# Altium PCB ArduinoUnoPCB.PcbDoc
Units mil, origin at the board's own origin, x right, y up, seen from the top; angles counter-clockwise.
Board outline 2850 x 2155 mil, 2 copper layers (Top Layer, Bottom Layer); 88 components, 66 nets, 297 pads, 22 vias.
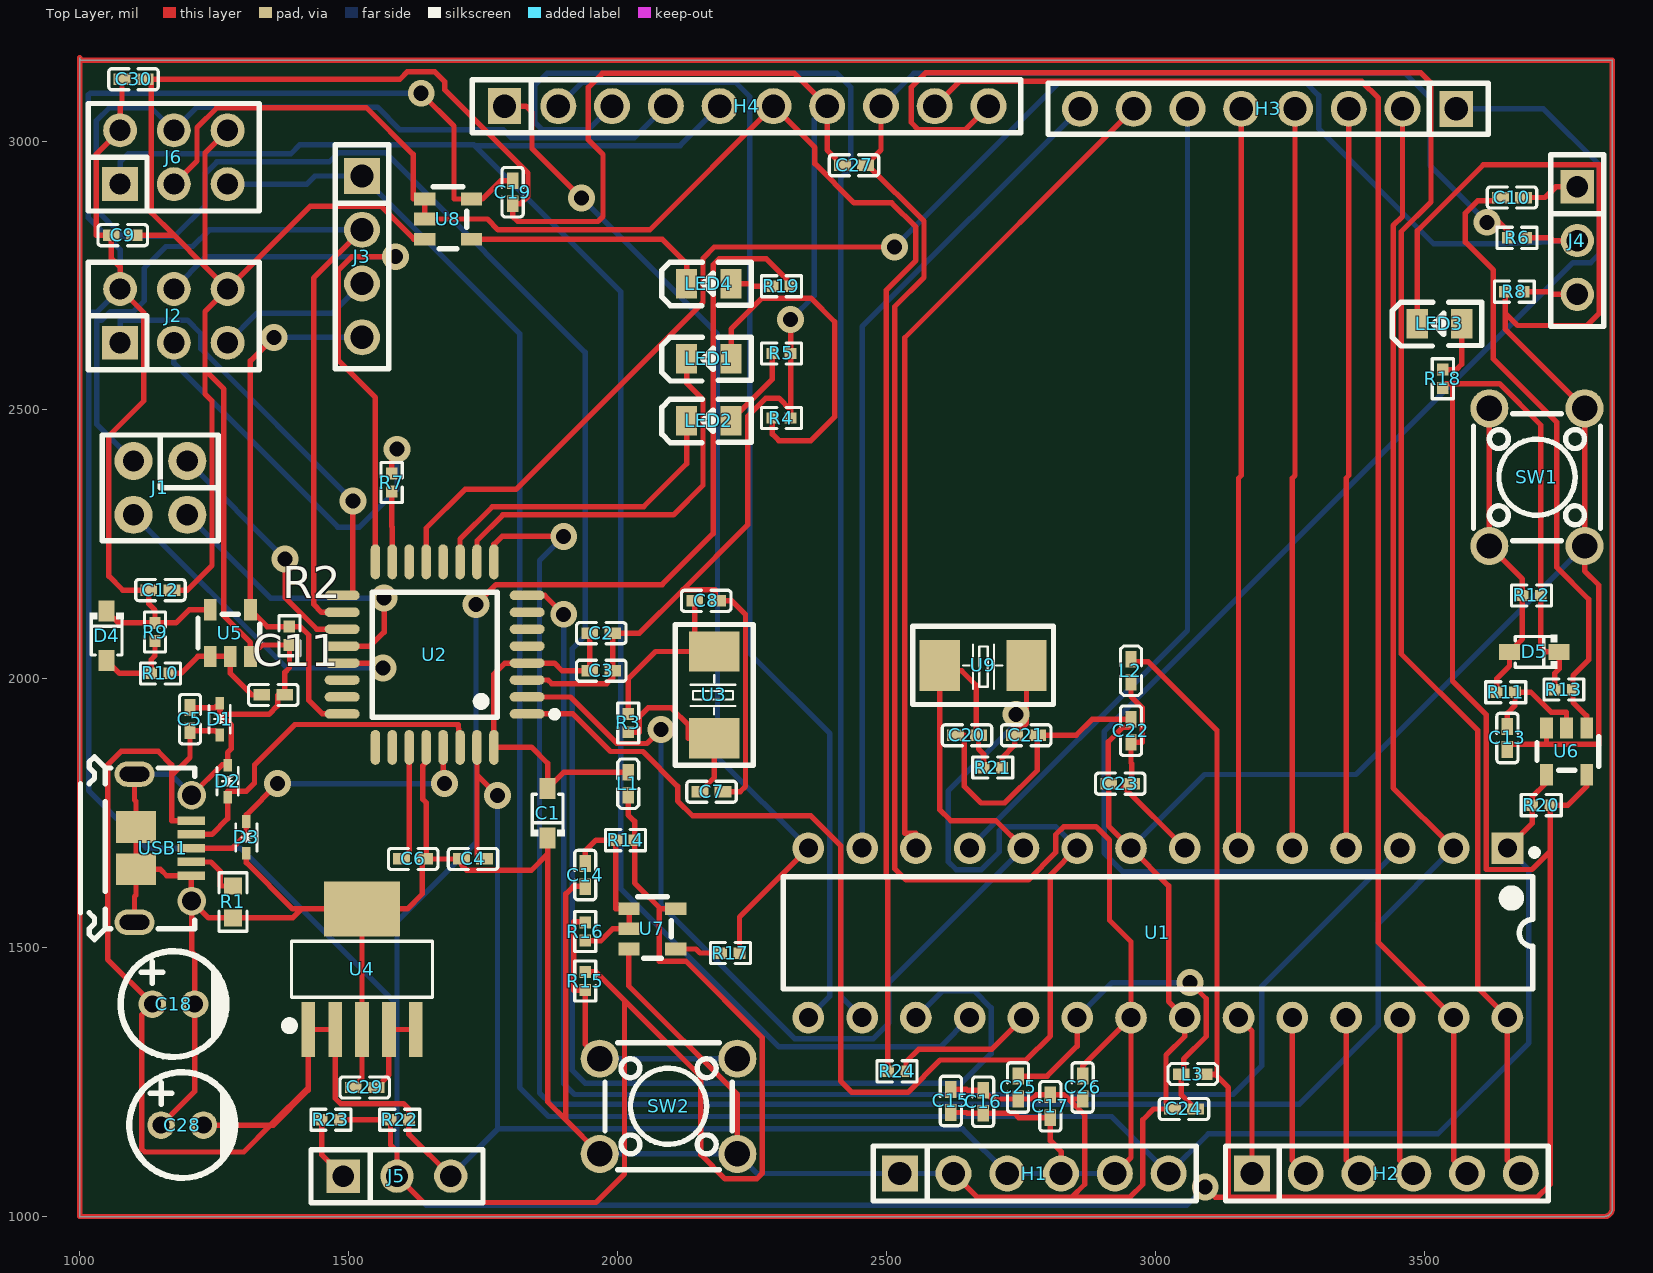
[diagram p0: Top Layer view]
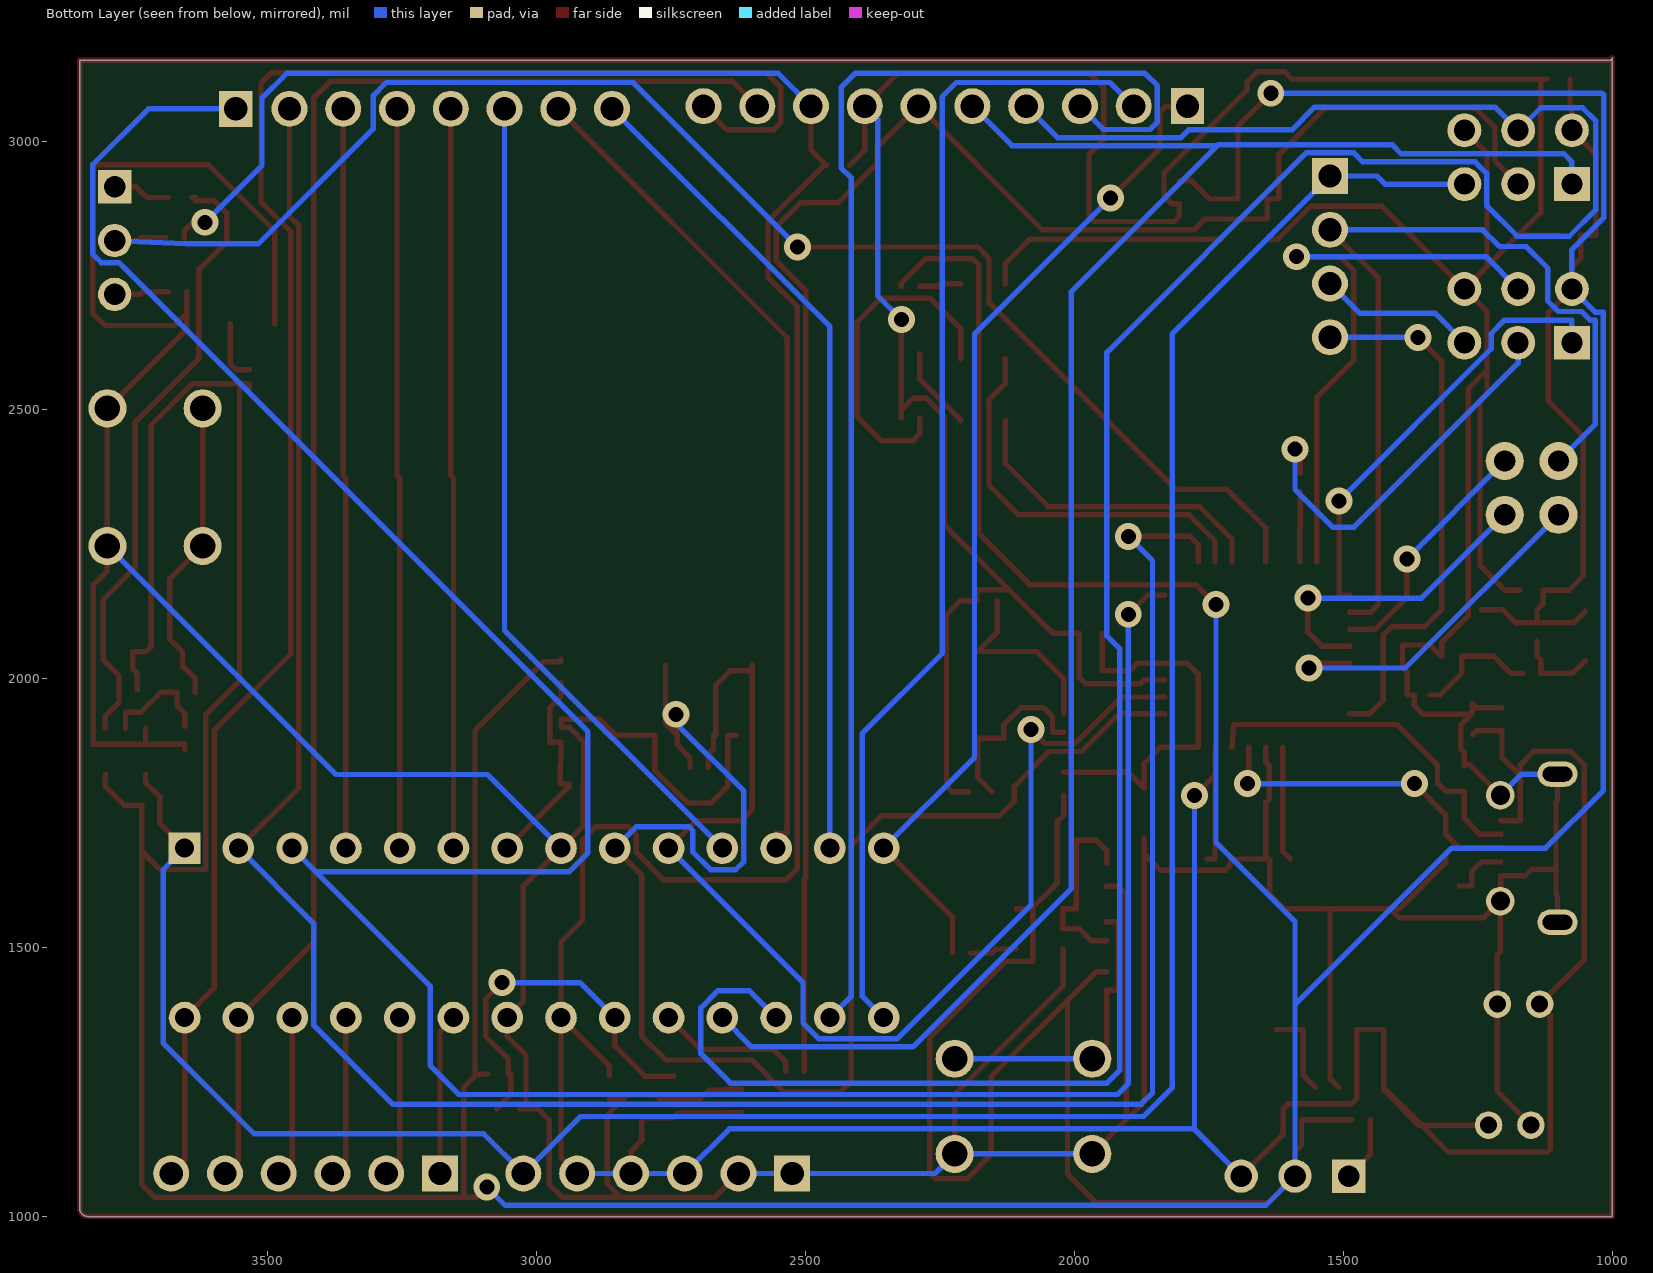
[diagram p1: Bottom Layer view, seen from below]

## Layer stack, top to bottom
Top Solder: solder mask 0.4, Solder Resist, Dk 3.5
Top Layer: signal copper 1.4
Dielectric 1: dielectric 12.6, FR-4, Dk 4.8
Bottom Layer: signal copper 1.4
Bottom Solder: solder mask 0.4, Solder Resist, Dk 3.5

## Board outline
1000,1000 1000,3155 ccw(c1005,3155) 1005,3150 3850,3150 3850,1015 cw(c3835,1015) 3835,1000

## Design rules (kind name [scope] priority, off if disabled: settings)
Clearance [All] p1: gap=10 ignorepadtopadclearanceinfootprint=FALSE except(5: Arc-Arc Arc-Track Arc-SMDPad Arc-THPad Track-Track Track-SMDPad Track-THPad SMDPad-SMDPad SMDPad-THPad THPad-THPad)
PolygonConnect [All] p1: connectstyle=Relief reliefconductorwidth=10 reliefentries=4 polygonreliefangle="90 Angle" airgapwidth=10
RoutingVias [All] p1: holewidth=28 width=50 viastyle="Through Hole" minholewidth=28 minwidth=50 maxholewidth=28 maxwidth=50
SolderMaskExpansion [All] p1: expansion=4 istentingtop=FALSE
SupplyNets "Schematic Supply Nets_4" [InNet('+5')] p1: voltage=0.000
SupplyNets "Schematic Supply Nets_3" [InNet('+5/3v3')] p2: voltage=0.000
SupplyNets "Schematic Supply Nets_2" [InNet('GND')] p3: voltage=0.000
SupplyNets "Schematic Supply Nets_1" [InNet('3V3')] p4: voltage=0.000
SupplyNets "Schematic Supply Nets" [InNet('+3V3')] p5: voltage=0.000
Width [All] p1: maxlimit=10 minlimit=10 preferedwidth=10
30 further rules are at their usual default settings.

## Components (designator, comment, footprint, x,y, rotation, side; value= is the part's Value field where it differs from the comment)
C1 "10nF" SOD-323_L1.8-W1.3-LS2.5-RD 1870,1750 r90 top value=18pF
C2 "100nF" C0402 1970,2085 r180 top value=18pF
C3 "100nF" C0402 1970,2015 r180 top value=18pF
C4 "100nF" C0402 1731.46,1665 r180 top
C5 "100nF" C0402 1205,1925 r270 top value=18pF
C6 "1uF" C0402 1620,1665 r180 top value=18pF
C7 "18pF" C0402 2175,1790 r180 top
C8 "18pF" C0402 2165,2145 r180 top
C9 "100nF" C0402 1080,2825 r0 top
C10 "100nF" C0402 3663.54,2895 r180 top value=18pF
C11 "100nF" C0402 1360,1970 r180 top value=18pF
C12 "100nF" C0402 1150,2165 r180 top value=18pF
C13 "100nF" C0402 3655,1890 r90 top value=18pF
C14 "100nF" C0402 1940,1635 r90 top value=18pF
C15 "100nF" C0402 2620,1215 r90 top
C16 "100nF" C0402 2680,1213.54 r90 top
C17 "100nF" C0402 2805,1205 r90 top
C18 "10uF" CAP-TH_BD5.0-P2.00-D0.8-FD 1174.37,1395 r0 top value=100nF
C19 "100nF" C0402 1805,2905 r270 top
C20 "18pF" C0402 2650,1895 r0 top
C21 "18pF" C0402 2760,1895 r180 top
C22 "10nF" C0402 2955,1903.54 r90 top value=100nF
C23 "100nF" C0402 2935,1805 r180 top
C24 "10nF" C0402 3053.54,1200 r180 top value=100nF
C25 "100nF" C0402 2745,1240 r270 top
C26 "100nF" C0402 2865,1240 r270 top
C27 "100nF" C0402 2440,2955 r180 top
C28 "10uF" CAP-TH_BD5.0-P2.00-D0.8-FD 1190.63,1170 r0 top value=18pF
C29 "10uF" C0402 1530,1240 r0 top value=18pF
C30 "100nF" C0402 1100,3115 r180 top value=18pF
D1 "LESD5D5.0CT1G" SOD-523_L1.2-W0.8-LS1.6-BI 1260,1925 r270 top
D2 "LESD5D5.0CT1G" SOD-523_L1.2-W0.8-LS1.6-BI 1275,1809.53 r270 top
D3 "LESD5D5.0CT1G" SOD-523_L1.2-W0.8-LS1.6-BI 1310,1705 r90 top
D4 "BAT54HT1G" SOD-323_L1.8-W1.3-LS2.5-RD 1050,2080 r270 top
D5 "BAT54HT1G" SOD-323_L1.8-W1.3-LS2.5-RD 3705,2050 r180 top
H1 "HDR-F-2.54_1X6" HDR-TH_6P-P2.54-V-M 2775,1080 r0 top
H2 "HDR-F-2.54-1*6" HDR-TH_6P-P2.54-V-M 3430,1080 r0 top
H3 "HDR-F-2.54-1*8" HDR-TH_8P-P2.54-V-F 3210,3060 r180 top
H4 "HDR-F-2.54_1X10" HDR-TH_10P-P2.54-V-F 2240,3065 r0 top
J1 "2.54-2*2" HDR-TH_4P-P2.54-V-F-R2-C2-S2.54 1150,2355 r180 top
J2 "HDR-M-2.54_2X3" HDR-TH_6P-P2.54-V-F-R2-C3-S2.54 1175,2675 r0 top
J3 "HDR-M-2.54-1*4" HDR-TH_4P-P2.54-V-F 1525,2785 r270 top
J4 "HDR-M-2.54_1X3" HDR-TH_3P-P2.54-V-F 3785,2815 r270 top
J5 "HDR-M2.54-1*3" HDR-TH_3P-P2.54-V-F 1590,1075 r0 top
J6 "HDR-M-2.54_2X3" HDR-TH_6P-P2.54-V-F-R2-C3-S2.54 1175,2970 r0 top
L1 "600H" L0402 2020,1805 r90 top value=9.1nH
L2 "600H" L0402 2955,2015 r270 top value=9.1nH
L3 "600H" L0402 3070,1265 r180 top value=9.1nH
LED1 "0805G (Green)" LED0805-R-RD 2170,2595 r0 top
LED2 "0805G (Green)" LED0805-R-RD 2170,2480 r0 top
LED3 "0805G (Green)" LED0805-R-RD 3528.65,2660 r0 top
LED4 "0805G (Green)" LED0805-R-RD 2170,2735 r0 top
R1 "0Ω" R0603 1285,1585 r270 top
R2 "10KΩ" R0402 1390,2080 r90 top value=1mΩ
R3 "1MΩ" R0402 2020,1917.96 r270 top value=1mΩ
R4 "1K" R0402 2305,2485 r0 top value=1mΩ
R5 "1K" R0402 2305,2605 r0 top value=1mΩ
R6 "100KΩ" R0402 3672.96,2820 r0 top value=1mΩ
R7 "22Ω" R0402 1580,2365 r90 top value=1mΩ
R8 "1K" R0402 3667.96,2720 r180 top value=1mΩ
R9 "10KΩ" R0402 1140,2087.04 r90 top value=1mΩ
R10 "22Ω" R0402 1150,2010 r180 top value=1mΩ
R11 "22" R0402 3652.04,1975 r180 top value=1mΩ
R12 "10KΩ" R0402 3700,2155 r0 top value=1mΩ
R13 "10KΩ" R0402 3760,1980 r180 top value=1mΩ
R14 "10KΩ" R0402 2015,1700 r0 top value=1mΩ
R15 "10KΩ" R0402 1940,1437.96 r90 top value=1mΩ
R16 "22" R0402 1940,1530 r90 top value=1mΩ
R17 "560" R0402 2210,1490 r180 top value=1mΩ
R18 "1KΩ" R0402 3535,2557.96 r270 top value=1mΩ
R19 "560" R0402 2305,2730 r0 top value=1mΩ
R20 "10KΩ" R0402 3717.96,1765 r0 top value=1mΩ
R21 "1MΩ" R0402 2697.96,1835 r0 top value=1mΩ
R22 "0" R0402 1595,1180 r0 top value=1mΩ
R23 "0" R0402 1467.04,1180 r0 top value=1mΩ
R24 "10KΩ" R0402 2520,1270 r0 top value=1mΩ
SW1 "PTS645SH50MTR92LFS" SW-TH_4P-L6.0-W6.0-P4.50-LS6.5 3710,2375 r270 top
SW2 "PTS645SH50MTR92LFS" SW-TH_4P-L6.0-W6.0-P4.50-LS6.5 2095,1205 r180 top
U1 "ATMEGA328P-PU" DIP-28_L34.6-W7.3-P2.54-LS10.2-BL 3005,1527.48 r180 top
U2 "ATMEGA16U2-AU" TQFP-32_L7.0-W7.0-P0.80-LS9.0-TL 1660,2045 r180 top
U3 "ABM7-16MHz-D2Y-T" OSC-SMD_L5.0-W3.2 2180,1970 r270 top value=16MHz
U4 "TL1963A-33DCQR" SOT-223-6_L6.5-W3.5-P1.27-LS7.0-BR 1525,1460 r270 top
U5 "SN74AHC1G09DBVR" SOT-23-5_L2.9-W1.6-P0.95-LS2.8-BL 1280,2085 r0 top
U6 "SN74AHC1G09DBVR" SOT-23-5_L2.9-W1.6-P0.95-LS2.8-BL 3765,1865 r180 top
U7 "SN74AHC1G09DBVR" SOT-23-5_L2.9-W1.6-P0.95-LS2.8-BL 2065,1535 r270 top
U8 "SN74AHC1G09DBVR" SOT-23-5_L2.9-W1.6-P0.95-LS2.8-BL 1685,2855 r270 top
U9 "ABM7-16MHz-D2Y-T" OSC-SMD_L5.0-W3.2 2680,2025 r0 top value=16MHz
USB1 "1050170001" MICRO-USB-SMD_105017-0001 1155,1685 r270 top

## Footprints (in the part's own frame and the unit in brackets; to place one, negate y for a bottom-side part, rotate by r counter-clockwise, add the part's x,y. Pads: shape width x height; smd on the part's side, far side on the other; paste and mask are expansions set on the pad)
C0402 [mm]
  rect 0.79x0.54 smd paste-100 mask+0.051: 1(-0.545,0) 2(0.545,0)
  silkscreen extent -1.17,-0.5 1.17,0.5
CAP-TH_BD5.0-P2.00-D0.8-FD [mm]
  round 1.3 hole 0.8: 1(-1,0) 2(1,0)
  silkscreen extent -2.5,-2.5 2.5,2.5
DIP-28_L34.6-W7.3-P2.54-LS10.2-BL [mm]
  rect 1.5x1.5 hole 0.9: 1(-16.51,-4)
  round 1.5 hole 0.9: 2(-13.97,-4) 3(-11.43,-4) 4(-8.89,-4) 5(-6.35,-4) 6(-3.81,-4) 7(-1.27,-4) 8(1.27,-4) 9(3.81,-4) 10(6.35,-4) 11(8.89,-4) 12(11.43,-4) 13(13.97,-4) 14(16.51,-4) 15(16.51,4) 16(13.97,4) 17(11.43,4) 18(8.89,4) 19(6.35,4) 20(3.81,4) 21(1.27,4) 22(-1.27,4) 23(-3.81,4) 24(-6.35,4) 25(-8.89,4) 26(-11.43,4) 27(-13.97,4) 28(-16.51,4)
  silkscreen extent -17.94,-3.95 17.7,2.65
HDR-TH_3P-P2.54-V-F [mil]
  rect 62x62 hole 40.16: 1(-100,0)
  round 62 hole 40.16: 2(0,0) 3(100,0)
  silkscreen extent -160,-49 160,49
HDR-TH_4P-P2.54-V-F [mm]
  rect 1.7x1.7 hole 1.1: 1(-3.81,0)
  round 1.7 hole 1.1: 2(-1.27,0) 3(1.27,0) 4(3.81,0)
  silkscreen extent -5.29,-1.27 5.29,1.27
HDR-TH_4P-P2.54-V-F-R2-C2-S2.54 [mm]
  round 1.8 hole 1: 1(-1.27,-1.27) 2(-1.27,1.27) 3(1.27,-1.27) 4(1.27,1.27)
  silkscreen extent -2.74,-2.5 2.74,2.5
HDR-TH_6P-P2.54-V-F-R2-C3-S2.54 [mm]
  rect 1.7x1.6 hole 1: 1(-2.54,-1.27)
  round 1.6 hole 1: 2(-2.54,1.27) 3(0,-1.27) 4(0,1.27) 5(2.54,-1.27) 6(2.54,1.27)
  silkscreen extent -4.04,-2.54 4.04,2.54
HDR-TH_6P-P2.54-V-M [mm]
  rect 1.7x1.7 hole 1.1: 1(-6.35,0)
  round 1.7 hole 1.1: 2(-3.81,0) 3(-1.27,0) 4(1.27,0) 5(3.81,0) 6(6.35,0)
  silkscreen extent -7.6,-1.3 7.65,1.3
HDR-TH_8P-P2.54-V-F [mm]
  rect 1.575x1.7 hole 1.1: 1(-8.89,0)
  round 1.7 hole 1.1: 2(-6.35,0) 3(-3.81,0) 4(-1.27,0) 5(1.27,0) 6(3.81,0) 7(6.35,0) 8(8.89,0)
  silkscreen extent -10.4,-1.2 10.4,1.2
HDR-TH_10P-P2.54-V-F [mm]
  rect 1.575x1.7 hole 1.1: 1(-11.43,0)
  round 1.7 hole 1.1: 2(-8.89,0) 3(-6.35,0) 4(-3.81,0) 5(-1.27,0) 6(1.27,0) 7(3.81,0) 8(6.35,0) 9(8.89,0) 10(11.43,0)
  silkscreen extent -12.95,-1.25 12.95,1.25
L0402 [mm]
  rect 0.79x0.54 smd paste-100 mask+0.051: 1(-0.545,0) 2(0.545,0)
  silkscreen extent -1.17,-0.5 1.17,0.5
LED0805-R-RD [mm]
  rect 1x1.4 smd: 1(1.05,0) 2(-1.05,0)
  silkscreen extent -2.22,-1.04 1.99,1.01
MICRO-USB-SMD_105017-0001 [mm]
  rect 0.4x1.3 smd paste-100 mask+0.051: 1(-1.3,1.33) 2(-0.65,1.33) 3(0,1.33) 4(0.65,1.33) 5(1.3,1.33)
  round 1.35 hole 0.9: 6(-2.5,1.35) 7(2.5,1.35)
  oval 1.2x1.9 hole 0.7 slot 1.4 at 90 deg: 8(3.5,-1.35) 9(-3.5,-1.35)
  rect 1.5x1.9 smd paste-100 mask+0.051: 10(-1,-1.28) 10(1,-1.28)
  silkscreen extent -4.32,-3.9 4.32,1.5
OSC-SMD_L5.0-W3.2 [mm]
  rect 1.9x2.4 smd: 1(-2.05,0) 2(2.05,0)
  silkscreen extent -3.33,-1.85 3.33,1.85
R0402 [mm]
  rect 0.566x0.54 smd paste-100 mask+0.051: 1(-0.433,0) 2(0.433,0)
  silkscreen extent -0.94,-0.5 0.94,0.5
R0603 [mil]
  rect 31.75x34.02 smd paste-3937.01 mask+2: 1(-29.66,0) 2(29.65,0)
  silkscreen extent -55,-26 55,26
SOD-323_L1.8-W1.3-LS2.5-RD [mm]
  rect 1x0.75 smd: 1(-1.173,0) 2(1.173,0)
  silkscreen extent -1.08,-0.8 0.9,0.8
SOD-523_L1.2-W0.8-LS1.6-BI [mm]
  rect 0.6x0.4 smd: 1(-0.75,0) 2(0.75,0)
  silkscreen extent -0.65,-0.5 0.65,0.5
SOT-23-5_L2.9-W1.6-P0.95-LS2.8-BL [mm]
  rect 0.6x1 smd paste+0 mask+0.05: 1(-0.95,-1.1) 2(0,-1.1) 3(0.95,-1.1) 4(0.95,1.1) 5(-0.95,1.1)
  silkscreen extent -1.52,-0.7 1.4,0.89
SOT-223-6_L6.5-W3.5-P1.27-LS7.0-BR [mm]
  rect 2.595x0.644 smd: 1(2.848,-2.54) 2(2.848,-1.27) 3(2.848,0) 4(2.848,1.27) 5(2.848,2.54)
  rect 2.595x3.6 smd: 6(-2.848,0)
  silkscreen extent -1.32,-3.63 2.87,3.33
SW-TH_4P-L6.0-W6.0-P4.50-LS6.5 [mm]
  round 1.8 hole 1.2: 1(-3.25,2.25) 2(3.25,2.25) 3(-3.25,-2.25) 4(3.25,-2.25)
  silkscreen extent -3,-3 3,3
TQFP-32_L7.0-W7.0-P0.80-LS9.0-TL [mm]
  oval 1.65x0.45 smd: 1(-4.369,2.8) 2(-4.369,2) 3(-4.369,1.2) 4(-4.369,0.4) 5(-4.369,-0.4) 6(-4.369,-1.2) 7(-4.369,-2) 8(-4.369,-2.8) 17(4.369,-2.8) 18(4.369,-2) 19(4.369,-1.2) 20(4.369,-0.4) 21(4.369,0.4) 22(4.369,1.2) 23(4.369,2) 24(4.369,2.8)
  oval 0.45x1.65 smd: 9(-2.8,-4.381) 10(-2,-4.381) 11(-1.2,-4.381) 12(-0.4,-4.381) 13(0.4,-4.381) 14(1.2,-4.381) 15(2,-4.381) 16(2.8,-4.381) 25(2.8,4.381) 26(2,4.381) 27(1.2,4.381) 28(0.4,4.381) 29(-0.4,4.381) 30(-1.2,4.381) 31(-2,4.381) 32(-2.8,4.381)
  silkscreen extent -5.81,-2.94 2.95,2.97

## Part data
C1 C2 C3 C5 C6 C7 C8 C10 C11 C12 C13 C14 C20 C21 C28 C29 C30: library part GRM1555C1H180JA01D, JLCPCB Part Class="Extended Part", LCSC Part Name="18pF ±5% 50V", Manufacturer=muRata(村田), Tolerance=±5%, Add into BOM=yes, Convert to PCB=yes, Datasheet=https://atta.szlcsc.com/upload/public/pdf/source/20161108/1478586362936.pdf, Device=GRM1555C1H180JA01D, Manufacturer Part=GRM1555C1H180JA01D, Supplier=LCSC, Supplier Footprint=0402, Supplier Part=C33149, Symbol=GRM1555C1H180JA01D
C4 C9 C15 C16 C17 C18 C19 C22 C23 C24 C25 C26 C27: library part KM104M050D11RR0VH2FP0, JLCPCB Part Class="Extended Part", LCSC Part Name="100nF ±20% 50V", Lifetime @ Temp=1000hrs@105℃, Manufacturer=CX(承兴), Tolerance=±20%, Add into BOM=yes, Convert to PCB=yes, Datasheet=https://atta.szlcsc.com/upload/public/pdf/source/20211027/06D6BA3719C264B639DC286D935D03EA.pdf, Device=KM104M050D11RR0VH2FP0, Manufacturer Part=KM104M050D11RR0VH2FP0, Supplier=LCSC, Supplier Footprint=插件,D5xL11mm, Supplier Part=C28061, Symbol="0.1UF 50V"
D1 D2 D3: Breakdown Voltage=5.6V, JLCPCB Part Class="Extended Part", LCSC Part Name=双向ESD, Manufacturer=LRC(乐山无线电), Maximum Clamping Voltage=18.6V, Peak Pulse Current (Ipp)=9.4A, Reverse Stand-Off Voltage (Vrwm)=5V, Add into BOM=yes, Convert to PCB=yes, Datasheet=https://atta.szlcsc.com/upload/public/pdf/source/20190807/C383211_633DF4B4E2C161403226E5235FE33A1C.pdf, Device=LESD5D5.0CT1G, Manufacturer Part=LESD5D5.0CT1G, polarity=Bidirectional, Supplier=LCSC, Supplier Footprint=SOD-523, Supplier Part=C383211, Symbol=LESD5D5.0CT1G, Type=ESD
D4 D5: Forward Voltage (Vf@If)=800mV@100mA, JLCPCB Part Class="Extended Part", LCSC Part Name="电压:30V 电流:200mA", Manufacturer=onsemi(安森美), Rectified Current=200mA, Reverse Leakage Current (Ir)=2uA@25V, Reverse Voltage (Vr)=30V, Add into BOM=yes, Convert to PCB=yes, Datasheet=https://atta.szlcsc.com/upload/public/pdf/source/20131023/1457706657764.pdf, Device=BAT54HT1G, Manufacturer Part=BAT54HT1G, Supplier=LCSC, Supplier Footprint=SOD-323, Supplier Part=C21107, Symbol=BAT54HT1G
H1: library part HB-PH3-25416PB2GOP, Color=Black, Current Rating=3A, JLCPCB Part Class="Extended Part", LCSC Part Name="1x6P 间距:2.54mm 方针 直插", Manufacturer=HANBO(汉博), Operating Temperature=-40℃~+105℃, Voltage Rating (Max)=250V, Add into BOM=yes, Circluar Pins/Square Pins=Policy, Contact Material=Brass, Contact Plating=Gold, Convert to PCB=yes, Datasheet=https://atta.szlcsc.com/upload/public/pdf/source/20230803/F72D259687963761DF1B552F3BB84A31.pdf, Device=HB-PH3-25416PB2GOP, Insulation Height=2.54mm, Length of End Connection Pin=3mm, Length of Mating Pin=6mm, Manufacturer Part=HB-PH3-25416PB2GOP, Mounting Type=Straight, Number of Pins=6P, Number of Rows="Single Row", Pin Structure=1x6P, Pitch=2.54mm, Row Spacing=2.54mm, Supplier=LCSC, Supplier Footprint=插件,P=2.54mm, Supplier Part=C6332199, Symbol=HB-PH3-25416PB2GOP
H2: library part 2.54-1*6, JLCPCB Part Class="Extended Part", Manufacturer=ZHOURI(洲日), Add into BOM=yes, Convert to PCB=yes, Datasheet=https://atta.szlcsc.com/upload/public/pdf/source/20250227/F941FC765EF241ABFB2D5D72948A31A5.pdf, Device=2.54-1*6, LCSC Part Name=2.54-1*6, Manufacturer Part=2.54-1*6, Number of Pins=6P, Number of Rows="Single Row", Pin Structure=1x6P, Pitch=2.54mm, Supplier=LCSC, Supplier Footprint=插件,P=2.54mm, Supplier Part=C5156615, Symbol=2.54-1*6
H3: library part PM2.54-1*8, Current Rating (Max)=2.5A, JLCPCB Part Class="Extended Part", LCSC Part Name="间距:2.54mm 1x8P 直插", Manufacturer=ZHOURI(洲日), Operating Temperature Range=-40℃~+105℃, Add into BOM=yes, Circular Hole / Square Hole=方孔, Convert to PCB=yes, Datasheet=https://atta.szlcsc.com/upload/public/pdf/source/20221031/E5BAE727A502DC7C69CE947E807E2296.pdf, Device=PM2.54-1*8, Holes Direction=Top, Holes Structure=1x8P, Insulation Height=8.5mm, Manufacturer Part=PM2.54-1*8, Mounting Type=Straight, Number of Holes=8P, Number of Rows=Plugin, Pitch=2.54mm, Row Spacing=2.54mm, Supplier=LCSC, Supplier Footprint=插件,P=2.54mm, Supplier Part=C5224027, Symbol=PM2.54-1*8
H4: library part BX-PM2.54-1-10PY, Current Rating (Max)=-, JLCPCB Part Class="Extended Part", LCSC Part Name="1x10P 间距:2.54mm 直插", Manufacturer=Bossie(博锡), Operating Temperature Range=-40℃~+105℃, Soldering Temperature(Max)=260℃@5S, Voltage Rating (Max)=1kV, Add into BOM=yes, Circular Hole / Square Hole="Square Hole", Contact Material=-, Contact Plating=Gold, Convert to PCB=yes, Datasheet=https://atta.szlcsc.com/upload/public/pdf/source/20231017/732584F7F0B2D917FE86A7328410C345.pdf, Device=BX-PM2.54-1-10PY, Holes Direction=Top, Holes Structure=1x10P, Insulation Height=8.5mm, Manufacturer Part=BX-PM2.54-1-10PY, Mounting Type="Direct Insert", Number of Holes=10P, Number of Rows="Single Row", Pitch=2.54mm, Row Spacing=-, Supplier=LCSC, Supplier Footprint=插件,P=2.54mm, Supplier Part=C18078132, Symbol=BX-PM2.54-1-10PY
J1: Current Rating (Max)=2.5A, JLCPCB Part Class="Extended Part", LCSC Part Name="间距:2.54mm 2x2P 直插", Manufacturer=ZHOURI(洲日), Operating Temperature Range=-40℃~+105℃, Voltage Rating (Max)=-, Add into BOM=yes, Circular Hole / Square Hole="Square Holes", Convert to PCB=yes, Datasheet=https://atta.szlcsc.com/upload/public/pdf/source/20220328/0DEB63D734370D90CA736158671615A0.pdf, Device=2.54-2*2, Holes Direction=Top, Holes Structure=2x2P, Insulation Height=8.5mm, Manufacturer Part=2.54-2*2, Mounting Type=Straight, Number of Holes=4P, Number of Rows=双排, Pitch=2.54mm, Row Spacing=2.54mm, Supplier=LCSC, Supplier Footprint=插件,P=2.54mm, Supplier Part=C2977590, Symbol=2.54-2*2
J2 J6: library part PM254-2-03-Z-8.5, Current Rating (Max)=3A, JLCPCB Part Class="Extended Part", LCSC Part Name="2x3P 间距:2.54mm 直插", Manufacturer=HCTL(华灿天禄), Operating Temperature Range=-40℃~+105℃, Soldering Temperature(Max)=260℃@5S, Voltage Rating (Max)=-, Add into BOM=yes, Circular Hole / Square Hole="Square Holes", Contact Material="Copper Alloy", Convert to PCB=yes, Datasheet=https://atta.szlcsc.com/upload/public/pdf/source/20230609/3D36CA2C1BFC9FD1C3F709AD9DFEB9C2.pdf, Device=PM254-2-03-Z-8.5, Holes Direction=Top, Holes Structure=2x3P, Insulation Height=8.5mm, Manufacturer Part=PM254-2-03-Z-8.5, Mounting Type=Straight, Number of Holes=6P, Number of Rows=双排, Pitch=2.54mm, Row Spacing=2.54mm, Supplier=LCSC, Supplier Footprint=插件,P=2.54mm, Supplier Part=C2897404, Symbol=PM254-2-03-Z-8.5
J3: library part PM2.54-1*4, Current Rating (Max)=2.5A, JLCPCB Part Class="Extended Part", LCSC Part Name="间距:2.54mm 1x4P 直插", Manufacturer=ZHOURI(洲日), Operating Temperature Range=-40℃~+105℃, Add into BOM=yes, Circular Hole / Square Hole=方孔, Convert to PCB=yes, Datasheet=https://atta.szlcsc.com/upload/public/pdf/source/20220729/3385E3C3A9122AF204A83235A2975C64.pdf, Device=PM2.54-1*4, Holes Direction=Top, Holes Structure=1x4P, Insulation Height=8.5mm, Manufacturer Part=PM2.54-1*4, Mounting Type=Straight, Number of Holes=4P, Number of Rows=Plugin, Pitch=2.54mm, Row Spacing=2.54mm, Supplier=LCSC, Supplier Footprint=插件,P=2.54mm, Supplier Part=C5116530, Symbol=PM2.54-1*4
J4: library part PM254V-11-03-H85, JLCPCB Part Class="Extended Part", LCSC Part Name="间距:2.54mm 1x3P 直插", Manufacturer=XFCN(兴飞), Add into BOM=yes, Contact Material=Brass, Contact Plating=-, Convert to PCB=yes, Datasheet=https://atta.szlcsc.com/upload/public/pdf/source/20200518/C541849_85853D71FC67C51915A806977A588FDA.pdf, Device=PM254V-11-03-H85, Holes Structure=1x3P, Insulation Height=-, Manufacturer Part=PM254V-11-03-H85, Mounting Type=Straight, Number of Holes=3P, Number of Rows=Plugin, Pitch=2.54mm, Row Spacing=-, Supplier=LCSC, Supplier Footprint=插件,P=2.54mm, Supplier Part=C541850, Symbol=PM254V-11-03-H85
J5: library part PM2.54-1*3, Current Rating (Max)=2.5A, JLCPCB Part Class="Extended Part", LCSC Part Name="间距:2.54mm 1x3P 直插", Manufacturer=ZHOURI(洲日), Operating Temperature Range=-40℃~+105℃, Add into BOM=yes, Circular Hole / Square Hole=方孔, Convert to PCB=yes, Datasheet=https://atta.szlcsc.com/upload/public/pdf/source/20220729/0B9CDCB2053AD78CED9CDFEF888323E9.pdf, Device=PM2.54-1*3, Holes Direction=Top, Holes Structure=1x3P, Insulation Height=8.5mm, Manufacturer Part=PM2.54-1*3, Mounting Type=Straight, Number of Holes=3P, Number of Rows=Plugin, Pitch=2.54mm, Row Spacing=2.54mm, Supplier=LCSC, Supplier Footprint=插件,P=2.54mm, Supplier Part=C5116529, Symbol=PM2.54-1*3
L1 L2 L3: library part LQG15HS9N1J02D, JLCPCB Part Class="Extended Part", LCSC Part Name="9.1nH ±5%", Manufacturer=muRata(村田), Q @ Freq=8@100MHz, Saturation Current (Isat)=-, Tolerance=±5%, Add into BOM=yes, Convert to PCB=yes, Datasheet=https://atta.szlcsc.com/upload/public/pdf/source/20180612/C185484_14F678484DDF036353DC67B6265A9221.pdf, Device=LQG15HS9N1J02D, Manufacturer Part=LQG15HS9N1J02D, Supplier=LCSC, Supplier Footprint=0402, Supplier Part=C162547, Symbol=LQG15HS9N1J02D, Type=叠层电感
LED1 LED2 LED3 LED4: library part KT-0805G, Color Temperature=-, Emitted Color=Emerald, JLCPCB Part Class="Basic Part", LCSC Part Name="0805 翠绿 高亮", Manufacturer=KENTO, Add into BOM=yes, Convert to PCB=yes, Datasheet=https://atta.szlcsc.com/upload/public/pdf/source/20170209/1486607340485.pdf, Device=KT-0805G, Diode Configuration=-, Dominant Wavelength=-, Forward Current=-, Forward Voltage (VF)=-, Lamp Holder Type=-, Lens Color=-, Luminous Intensity=-, Manufacturer Part=KT-0805G, Mounting Sytle=-, Operating Temperature=-, Peak Wavelength=-, Power Dissipation=-, Supplier=LCSC, Supplier Footprint=0805, Supplier Part=C2297, Symbol="0805G (Green)", Viewing Angle=-
R1: JLCPCB Part Class="Extended Part", Manufacturer=YAGEO(国巨), Manufacturer Part=RC0603FR-070RL, nameAlias=Value, spicePre=R, spiceSymbolName=RC0603FR-070RL, Supplier=LCSC, Supplier Part=C100044
R2 R3 R4 R5 R6 R7 R8 R9 R10 R11 R12 R13 R14 R15 R16 R17 R18 R19 R20 R21 R22 R23 R24: library part WSL25121L000FEA18, JLCPCB Part Class="Extended Part", LCSC Part Name="1mΩ ±1% 2W", Manufacturer=VISHAY(威世), Rated Current=-, Temperature Coefficient=±275ppm/℃, Tolerance=±1%, Add into BOM=yes, Convert to PCB=yes, Datasheet=https://atta.szlcsc.com/upload/public/pdf/source/20180730/C149567_AEEE3780A8EE98747C02CEA4CDC81D3F.pdf, Device=WSL25121L000FEA18, Manufacturer Part=WSL25121L000FEA18, Mounting Sytle="Surface Mount", Rated Output Voltage=-, Supplier=LCSC, Supplier Footprint=2512, Supplier Part=C149567, Symbol=WSL25121L000FEA18, Type="Current Sensing Resistors"
SW1 SW2: library part TC-00104FB-110E-03, Contact Current=50mA, JLCPCB Part Class="Extended Part", Manufacturer=HOOYA(皓宇电子), Voltage Rating (DC)=12V, Add into BOM=yes, Convert to PCB=yes, Datasheet=https://atta.szlcsc.com/upload/public/pdf/source/20240226/4796A29EA251D564C3D729191F5C4338.pdf, Device=TC-00104FB-110E-03, LCSC Part Name=TC-00104FB-110E-03, Manufacturer Part=TC-00104FB-110E-03, Supplier=LCSC, Supplier Footprint=DIP, Supplier Part=C7542981, Symbol=TC-00104FB-110E-03
U1: JLCPCB Part Class="Extended Part", LCSC Part Name="基于AVR增强型RISC架构的低功耗CMOS 8位微控制器 MSL=1", Low-Voltage Detect=有, Manufacturer=MICROCHIP(美国微芯), Operating Temperature Range=-40℃~+85℃, Operating Voltage Range=1.8V~5.5V, ADC (Bit)=10bit, Add into BOM=yes, CCP Capture/Compare=-, communication protocol=-, Convert to PCB=yes, CPU Core=AVR, CPU Maximum Speed=20MHz, DAC (Bit)=-, Datasheet=https://atta.szlcsc.com/upload/public/pdf/source/20150124/1457707257819.pdf, Device=ATMEGA328P-PU, Direct Memory Access=-, EEPROM=1KB, GPIO Ports Number=23, Infrared Data Association=-, Internal Comparator=-, Internal Oscillator=有, Manufacturer Part=ATMEGA328P-PU, Peripheral/Function=WDT；PWM, Program Memory Type=FLASH, Program Storage Size=32KB, PWM (Bit)=-, RAM Size=2KB, Real-Time Clock=-, Secure Digital Input and Output=-, Supplier=LCSC, Supplier Footprint=DIP-28-300mil, Supplier Part=C33901, Symbol=ATMEGA328P-PU, Universal Serial Bus=-, Watchdog=有
U2: JLCPCB Part Class="Extended Part", Low-Voltage Detect=有, Manufacturer=MICROCHIP(美国微芯), Operating Temperature Range=-40℃~+85℃, Operating Voltage Range=2.7V~5.5V, ADC (Bit)=-, Add into BOM=yes, CCP Capture/Compare=-, communication protocol=-, Convert to PCB=yes, CPU Core=AVR, CPU Maximum Speed=16MHz, DAC (Bit)=-, Datasheet=https://atta.szlcsc.com/upload/public/pdf/source/20150921/1457707392275.pdf, Device=ATMEGA16U2-AU, Direct Memory Access=-, EEPROM=512Byte, GPIO Ports Number=22, Infrared Data Association=-, Internal Comparator=-, Internal Oscillator=有, LCSC Part Name=ATMEGA16U2-AU, Manufacturer Part=ATMEGA16U2-AU, Peripheral/Function=WDT；PWM, Program Memory Type=FLASH, Program Storage Size=16KB, PWM (Bit)=-, RAM Size=512Byte, Real-Time Clock=-, Secure Digital Input and Output=-, Supplier=LCSC, Supplier Footprint=TQFP-32(7x7), Supplier Part=C59019, Symbol=ATMEGA16U2-AU, Universal Serial Bus=有, Watchdog=有
U3 U9: library part X503216MSB2GI, Frequency Stability=±20ppm, JLCPCB Part Class="Extended Part", LCSC Part Name="16MHz ±10ppm 20pF", Manufacturer=YXC(扬兴晶振), Normal temperature Frequency Tolerance=±10ppm, Operating Temperature=-40℃~+85℃, Add into BOM=yes, Convert to PCB=yes, Datasheet=https://atta.szlcsc.com/upload/public/pdf/source/20240329/44922B0AF7B60E58E9B66993B6077277.pdf, Device=X503216MSB2GI, Manufacturer Part=X503216MSB2GI, Supplier=LCSC, Supplier Footprint=SMD5032, Supplier Part=C112572, Symbol=X503216MSB2GI, Type="Surface Mount Crystal"
U4: Dropout Voltage=550mV@(1.5A), JLCPCB Part Class="Extended Part", LCSC Part Name="具有反向电流和反向电压保护功能的 1.5A、20V 超低压降稳压器", Manufacturer=TI(德州仪器), Maximum Input Voltage=20V, Operating Temperature=-40℃~+125℃, Output Current=1.5A, Output Voltage=3.3V, Power Supply Rejection Ratio (PSRR)=63dB@(120Hz), standby current=1mA, Add into BOM=yes, Convert to PCB=yes, Datasheet=https://www.ti.com/cn/lit/gpn/tl1963a, Device=TL1963A-33DCQR, Feature="防静电保护；低ESR；Thermal Protection(TSD)；Overcurrent Protection(OCP)；带使能", Manufacturer Part=TL1963A-33DCQR, Number of Outputs=1, Output Polarity="Positive electrode", Output Type=Fixed, Supplier=LCSC, Supplier Footprint=SOT-223-6, Supplier Part=C2873060, Symbol=TL1963A-33DCQR
U5 U6 U7 U8: JLCPCB Part Class="Extended Part", Manufacturer=TI(德州仪器), Operating Temperature=-55℃~+125℃, Quiescent Current (Max)=1uA, Sink Current=8mA, Source Current=-, Supply Voltage=2V~5.5V, Add into BOM=yes, Convert to PCB=yes, Datasheet=https://www.ti.com/cn/lit/gpn/sn74ahc1g09, Device=SN74AHC1G09DBVR, High Level Range (VIH)=1.5V~3.85V, LCSC Part Name=SN74AHC1G09DBVR, Logic Gate Type=与门, Low Level Range (VIL)=500mV~1.65V, Manufacturer Part=SN74AHC1G09DBVR, Number of Channels=1, Propagation Delay Time=7.5ns@5V,50pF, Series=74AHCSeries, Supplier=LCSC, Supplier Footprint=SOT-23-5, Supplier Part=C840099, Symbol=SN74AHC1G09DBVR
USB1: Current Rating - Power (Max)=-, JLCPCB Part Class="Extended Part", LCSC Part Name="Micro-B 母 卧贴", Manufacturer=MOLEX, Operating Temperature Range=-30℃~+85℃, Add into BOM=yes, Connector Type=Micro-B, Convert to PCB=yes, Datasheet=https://atta.szlcsc.com/upload/public/pdf/source/20171113/C136000_15105610884381115465.pdf, Device=1050170001, Gender=Female, Manufacturer Part=1050170001, Mounting Style=卧贴, Number of Contacts=5P, Number of Ports=1, Standard="USB 2.0", Supplier=LCSC, Supplier Footprint=SMD, Supplier Part=C136000, Symbol=105017-0001

## Via types
v1: diameter 50, hole 28, Top Layer to Bottom Layer, 22 vias

## Nets (pads, with @x,y where several pads share a name; then routed paths per layer and width w, separated by ;. In a path a pad name is that pad's centre, name@x,y a point inside that pad or via, vN(x,y) a via of type N, cw(c..) or ccw(c..) an arc to the next point about the centre after c; other vN are vias at no path point)
3V3: C29.2 U4.4 U4.5 | length 167.6
  Top Layer w10: C29.2 1575,1263.54 U4.4 U4.5
16U2_16MHZ_XTAL1: C7.2 R3.2 U3.2 | length 344.1
  Top Layer w10: R3.2 2041,1900.92 2041,1930 2057,1946 2100,1946 2131.71,1914.29 2131.71,1889.29 U3.2 2180,1816.46 C7.2
16U2_16MHZ_XTAL2: C8.2 R3.1 U3.1 | length 355.4
  Top Layer w10: R3.1 2020,2000 2070.71,2050.71 U3.1 2143.54,2087.17 C8.2
16U2_BUF_RESET: C11.2 R10.1 U5.1 U5.2 | length 232.9
  Top Layer w10: R10.1 1188,2010 1219.69,2041.69 U5.1 U5.2 1280,2010 1320,1970 C11.2
16U2_HDR_RESET: J2.5 J3.3 | length 295.6
  Bottom Layer w10: J2.5 1330,2680 1470,2680 J3.3
16U2_MISO: J2.1 U2.17 | length 826.3
  Top Layer w10: U2.17 1508,2155.24 v1(1508,2331)
  Bottom Layer w10: J2.1 1075,2667 1200,2667 1225,2642 1225,2614 v1(1508,2331)
16U2_MOSI: J2.4 U2.16 | length 1124.2
  Top Layer w10: U2.16 1549.76,2523.24 1481,2592 1481,2760 1506,2785 v1(1587,2785)
  Bottom Layer w10: J2.4 1235,2785 v1(1587,2785)
16U2_PB4: J1.3 J3.2 U2.18 | length 1681.6
  Top Layer w10: U2.18 1450,2123.74 1435,2138.74 1435,2745 J3.2
  Bottom Layer w10: J1.3 1031.53,2473.47 1031.53,2666.5 1040.5,2666.5 1057,2683 1100,2683 1120,2703 1120,2764 1160,2804 1210,2804 1241,2835 J3.2
16U2_PB5: J1.1 U2.19 | length 459.7
  Top Layer w10: v1(1382,2223) 1382,2151 1440.76,2092.24 U2.19
  Bottom Layer w10: J1.1 v1(1382,2223)
16U2_PB6: J1.2 U2.20 | length 582.2
  Top Layer w10: U2.20 1540,2060.75 1566,2086.75 v1(1566,2150)
  Bottom Layer w10: J1.2 1355,2150 v1(1566,2150)
16U2_PB7: J1.4 U2.21 | length 661.9
  Top Layer w10: U2.21 1554.75,2029.25 v1(1564,2020)
  Bottom Layer w10: J1.4 1385,2020 v1(1564,2020)
16U2_RESET: J3.4 R2.2 U2.24 U5.4 | length 1010.4
  Top Layer w10: v1(1361,2635) 1317.4,2591.4 U5.4 1348.67,2097.04 R2.2 1410,2097.04 1426,2081.04 1426,1960 1451.24,1934.76 U2.24
  Bottom Layer w10: v1(1361,2635) J3.4
16U2_RX_LED: LED1.2 U2.10 | length 749.8
  Top Layer w10: U2.10 1738.74,2256.74 1787,2305 2104,2305 2159,2360 2159,2519.65 2128.65,2550 LED1.2
16U2_SCLK: J2.3 R7.2 | length 732.4
  Top Layer w10: R7.2 1580,2417 v1(1590,2427)
  Bottom Layer w10: J2.3 1175,2587 1480,2282 1520,2282 1590,2352 v1(1590,2427)
16U2_TX_LED: LED2.2 U2.11 | length 601.9
  Top Layer w10: U2.11 1707.24,2260 1767.24,2320 2048.65,2320 2128.65,2400 LED2.2
16U2PROG_328P_RESET: J4.2 R6.2 U2.13 | length 2852.5
  Top Layer w10: U2.13 1644.25,2280 1716.5,2352.25 1811.25,2352.25 2159,2700 2159,2782 2180,2803 v1(2515,2803) ; R6.2 3735,2820 3740,2815 J4.2
  Bottom Layer w10: v1(2515,2803) 2821,3109 3280,3109 3304,3085 3304,3023 3518,2809 3651,2809 J4.2
328P_16MHZ_XTAL1: C21.2 R21.2 U1.9 U2.1 U9.2 | length 2846
  Top Layer w10: U2.1 1917.24,1934.76 1987.22,1864.78 2047.22,1864.78 2112,1800 2112,1773 2140,1745 2360,1745 2415,1690 2415,1252 2436,1231 2540,1231 2600,1291 2760,1291 2805,1336 2805,1634.96 U1.9 ; R21.2 2715,1853 2738.54,1876.54 C21.2 ; v1(2741,1934) C21.2@2741,1897.46 ; U9.2 2760.71,1917.17 C21.2@2741,1897.46 ; C21.2 C21.2@2741,1897.46 ; C21.2 2741,1895 C21.2@2741,1897.46
  Bottom Layer w10: v1(2741,1934) 2741,1917 2615,1791 2615,1660 2630,1645 2677,1645 2710,1678 2710,1718 2717,1725 2814.96,1725 U1.9
328P_16MHZ_XTAL2: C20.2 R21.1 U1.10 U2.2 U9.1 | length 2284.1
  Top Layer w10: U2.2 1912.52,1966.26 1999,1879.78 2054.78,1879.78 v1(2081,1906) ; U9.1 U9.1@2599.29,2015 ; R21.1 2680.92,1860 2671.46,1869.46 C20.2 2667,1895 2667,1988 2640,2015 U9.1@2599.29,2015 ; U1.10 2703.96,1736 2620,1736 2599.29,1756.71 U9.1@2599.29,2015
  Bottom Layer w10: v1(2081,1906) 2081,1579.47 2330,1330.47 2475.47,1330.47 2505,1360 2505,1434.96 U1.10
328P_AUTORESET: C10.2 R13.1 U6.1 | length 1155.8
  Top Layer w10: C10.2 3634,2895 3634,2889.37 3600,2889.37 3576.78,2866.15 3576.78,2812.22 3629,2760 3629,2595 3747,2477 3747,2207 3806,2148 3806,2034.96 3777.04,2006 R13.1 3777.04,1956.36 3802.4,1931 U6.1
328P_BUF_RESET: C13.2 R11.1 U6.2 | length 210.3
  Top Layer w10: C13.2 3655,1936 3669.08,1950.08 R11.1 3699,1975 3736,1938 3765,1938 U6.2
328P_RESET: H1.6 J3.1 J6.5 R20.1 U1.1 U6.4 | length 4661.8
  Top Layer w10: U1.1 3700.92,1730.88 R20.1 3700.92,1780 3727.6,1806.68 U6.4
  Bottom Layer w10: J6.5 1422.25,2920 1437.25,2935 J3.1 1818,2642 1818,1240 1872,1186 2919,1186 H1.6 3099,1154 3526,1154 3695,1323 3695,1644.96 U1.1
+3V3: J5.1 R23.1 | length 121.6
  Top Layer w10: R23.1 1450,1115 J5.1
+5: C4.1 C5.2 C15.1 C16.1 C17.1 C18.1 C26.1 C27.1 C28.2 D1.2 H1.3 H1.4 H1.5 H4.8 J5.3 R6.1 R22.2 U1.21 U2.31 U4.1 U4.2 USB1.1 | length 9169.5
  Top Layer w10: USB1.1 1171,1736.18 1171,1820 ; C28.2 1355,1170 ; D1.2 1251.94,1903.54 C5.2 1205,1854 1171,1820 ; J5.3 1612.04,1152.96 R22.2 1612.04,1200 1602.04,1210 1485,1210 1475,1220 U4.2 U4.1 1425,1240 ; U2.31 1738.74,1821.26 ; C4.1 1738.74,1665 1738.74,1821.26 ; v1(1777,1783) 1738.74,1821.26 ; H4.8 2490,2983.54 C27.1 2466,2955 2570,2851 2570,2746.47 2515.47,2691.94 2515.47,1647 2536.47,1626 2764,1626 2815,1677 2815,1710 2830,1725 2890,1725 2915,1700 2915,1551 2955,1511 U1.21 ; C15.1 2649,1193.54 2650.46,1192.08 C16.1 2738,1192.08 2746.54,1183.54 C17.1 2805,1141 2825,1121 H1.4 ; C26.1 2865,1280 U1.21 ; H1.5 2955,1110 U1.21 ; v1(3617,2849) 3640,2849 3655.92,2833.08 R6.1 ; 1171,1820 1171,1840 1146,1865 1077,1865 1052,1840 1052,1478 C18.1 1115,1375 1115,1126 1121,1120 1305,1120 1355,1170 ; 1355,1170 1360,1170 1425,1235 1425,1240 ; 1355,1170 1425,1240
  Bottom Layer w10: v1(1777,1783) 1777,1163 ; H4.8 2551,3126 3465,3126 3511,3080 3511,2955 v1(3617,2849) ; H1.5 H1.4 H1.3 2642,1163 1777,1163 ; 1777,1163 1777,1162 J5.3 1777,1163
+5/3v3: C9.1 C12.2 C19.1 C30.2 D4.1 D5.1 J2.2 J5.2 J6.2 L1.1 L2.1 L3.1 R9.2 R12.2 R13.2 R14.2 R15.2 R18.2 R19.2 R20.2 R22.1 R23.2 U5.5 U6.5 U7.5 U8.5 | length 15126.3
  Top Layer w10: D4.1 1072.09,2104.08 R9.2 ; C30.2 1078.54,3068.54 1075,3065 J6.2 1031,2976 1031,2825 C9.1 1058.54,2782.46 1075,2766 J2.2 1119,2681 1119,2517 1054,2452 1054,2191 1080,2165 C12.2 1128.54,2139.46 1140,2128 R9.2 ; U5.5 1203.23,2128.31 1179,2104.08 R9.2 ; R23.2 R22.1 1577.96,1133.04 1590,1121 J5.2 1639,1026 1960,1026 2013,1079 2013,1402 ; v1(1635,3089) 1696,3028 1696,2892.4 U8.5 1749,2892.4 1783.06,2926.46 C19.1 ; v1(1737,2138) 1774,2175 2083.03,2175 2178,2269.97 2178,2770 2189,2781 2277.04,2781 2322.04,2736 R19.2 ; R15.2 1960,1455 2013,1402 ; L1.1 2020,1747.04 2032.04,1735 R14.2 2032.04,1620.36 2080,1572.4 ; U7.5 2080,1572.4 ; L2.1 2955,2032 2987,2032 3115,1904 3115,1265 3113,1263 ; v1(3093,1055) 3112,1036 3136,1036 ; R18.2 3535,2549 3553,2549 ; R13.2 3742.96,2010 3751.17,2018.21 D5.1 3727,2050 3717.04,2059.96 R12.2 3717.04,2471.96 3640,2549 3553,2549 ; U6.5 3802.4,1800 3767.4,1765 R20.2 3735,1680 ; 2013,1402 2155,1260 2155,1115 2200,1070 2259,1070 2269,1080 2269,1333 2127,1475 2078,1475 2078,1572.4 2080,1572.4 ; 3113,1263 3136,1240 3136,1036 ; 3113,1263 3111,1265 L3.1 3113,1263 ; 3136,1036 3711,1036 3735,1060 3735,1680 ; 3553,2549 3553,1996 3615.47,1933.53 3615.47,1645.43 3700.43,1645.43 3735,1680
  Bottom Layer w10: v1(1635,3089) 1019,3089 1016,3086 1016,2857 1075,2798 J2.2 1031.53,2681.53 1016.53,2681.53 1016.53,1792.47 1124,1685 1299,1685 1590,1394 ; v1(1737,2138) 1737,1696 1590,1549 1590,1394 ; v1(3093,1055) 3059,1021 1644,1021 J5.2 1590,1394
GND: C1.1 C2.1 C3.1 C4.2 C5.1 C6.1 C7.1 C8.1 C9.2 C11.1 C12.1 C13.1 C14.1 C15.2 C16.2 C17.2 C18.2 C19.2 C20.1 C21.1 C22.2 C23.2 C24.2 C25.2 C26.2 C27.2 C28.1 C29.1 C30.1 D1.1 D2.1 D3.1 H1.1 H1.2 H4.7 J2.6 J6.6 LED3.2 R1.2 R2.1 R4.2 R5.2 R8.2 SW1.1 SW1.2 SW2.1 SW2.2 U1.8 U1.22 U2.3 U2.28 U4.3 U4.6 U5.3 U6.3 U7.3 U8.3 USB1.5 USB1.6 USB1.7 USB1.8 USB1.9 USB1.10 | length 17361.9
  Top Layer w10: C9.2 1175,2825 ; USB1.8 1101.86,1595 1104.61,1597.75 USB1.10@1104.61,1645.63 ; USB1.9 1101.86,1774.75 1104.61,1772 1104.61,1724.37 USB1.10@1104.61,1645.63 ; C30.1 C30.1@1133,3115 ; C28.1 1213.74,1232.48 C18.2 1213.74,1487 1208.15,1492.59 USB1.7 ; C12.1 1200,2165 1246,2211 1246,2517 1233,2530 1233,2574 ; C5.1 1251.93,1946.46 D1.1 ; USB1.6 1264.72,1840 D2.1@1275,1840 ; D2.1 D2.1@1275,1840 ; J6.6 1233,2978 1233,2767 ; D3.1 1310,1658 1395.89,1572.11 1412.76,1572.11 ; C29.1 1525,1256.46 U4.3 U4.6 ; U8.3 1621.4,2817.6 1560,2879 1429,2879 J2.6 ; U2.28 1644.25,1845 1638,1838.75 1638,1776.04 1644.25,1769.79 C6.1@1644.25,1665 ; U2.3 1871,1997.76 1877.76,1991 1980,1991 1991,2002 1991,2015 C3.1 C2.1 2041,2085 2121.63,2165.63 ; C1.1 1870,1674 ; C14.1 1940,1614 1918,1614 1904,1600 1904,1179.47 ; SW2.2 1904,1179.47 ; U7.3 2021,1497.6 2021,1429 2222.95,1227.05 SW2.1 ; C7.1 2228,1790 2238,1800 2238,2120 2213,2145 C8.1 2182,2145 2182,2165.63 2121.63,2165.63 ; R4.2 2322.04,2500 ; v1(2322.04,2668) R5.2 2322.04,2500 ; C27.2 2390,2983.54 H4.7 2329,3126 1972,3126 1946,3100 1946,3002 1973,2975 1973,2860 1963.43,2850.43 1814.57,2850.43 1805,2860 C19.2 1820,2883.54 1833.54,2897.08 1833.54,2940.46 1678.97,3095.03 1678.97,3110.03 1660,3129 1609.33,3129 1595.33,3115 C30.1@1133,3115 ; C15.2 2649,1236.46 2650.46,1235 C16.2 2696.46,1218.54 C25.2 2771,1218.54 2778.92,1226.46 C17.2 2831,1226.46 2838.92,1218.54 ; H1.2 2669,1036 2845,1036 ; C20.1 2645,1895 2645,1800 2676,1769 2720,1769 2781,1830 2781,1895 C21.1 2853,1895 2883,1925 C22.2 2955,1910 2940,1910 2913,1883 2913,1805 C23.2 2913.54,1726.42 U1.8 3025,1614.96 3025,1400 U1.22 3055,1335 3020,1300 3020,1212.08 C24.2 2997,1200 2977,1180 2977,1060 2953,1036 2845,1036 ; C26.2 2838.92,1218.54 ; LED3.2 3487.3,2833.06 3610.24,2956 3826,2956 3826,2680 3803,2657 3673.92,2657 3650.92,2680 ; R8.2 3650.92,2680 ; C13.1 3655,1878 3727.6,1878 ; U6.3 3727.6,1878 ; USB1.10@1104.61,1645.63 1150,1645.63 1161.83,1633.8 USB1.5 1207.36,1587.36 USB1.7 ; C30.1@1133,3115 1133,2867 1175,2825 ; 1175,2825 1233,2767 ; USB1.7 1239.38,1555.35 R1.2 1396,1555.35 1412.76,1572.11 ; 1233,2574 1233,2683 J2.6 ; 1233,2574 1268,2539 1268,2117 1317.4,2067.6 U5.3 1338.67,2062.96 R2.1 1390,2020.54 1381.46,2012 C11.1 1368,1970 1368,1950 1352,1934 1262,1934 ; 1233,2767 J2.6 ; D1.1 1262,1934 ; D1.1 1260,1936 1262,1934 ; 1262,1934 1282,1914 1282,1870 1275,1863 D2.1@1275,1840 ; 1412.76,1572.11 U4.6 ; U4.6 1609.11,1572.11 1637,1600 1637,1665 C6.1 C6.1@1644.25,1665 ; C6.1@1644.25,1665 C4.2 1710,1654 1720,1644 1840,1644 1870,1674 ; 1870,1674 1870,1213.47 1904,1179.47 ; 2121.63,2165.63 2242,2286 2242,2488 2276,2522 2300.04,2522 2322.04,2500 ; 2838.92,1218.54 2869,1188.46 2869,1060 2845,1036 ; 3650.92,2680 3650.92,2650.62 SW1.1 SW1.2 3798.58,2200.42 3825,2174 3825,1878 3727.6,1878
  Bottom Layer w10: USB1.9 1168.78,1822.8 USB1.6 ; SW2.2 SW2.1 2259.37,1080 H1.1 H1.2 ; v1(2322.04,2668) 2366,2711.96 2366,3041 H4.7 ; U1.8 3092.04,1822 3373.54,1822 SW1.2
IO8: H4.1 R17.1 U1.14 | length 1885.5
  Top Layer w10: H4.1 1830,3065 1841,3054 1841,2986 v1(1933,2894) ; R17.1 2227.04,1557 U1.14
  Bottom Layer w10: v1(1933,2894) 2186,2641 2186,1853.96 U1.14
MISO: H4.5 J6.1 U1.18 | length 3488.6
  Bottom Layer w10: J6.1 1075,2961.5 1090,2976.5 1392.5,2976.5 1409.47,2993.47 1732.57,2993.47 1734.5,2991.53 ; H4.5 2116.53,2991.53 1734.5,2991.53 ; U1.18 2600.47,1315.47 2300.47,1315.47 2006,1609.94 2006,2720.03 1734.5,2991.53
MOSI: H4.4 J6.4 U1.17 | length 4916.1
  Bottom Layer w10: H4.4 2031.53,3006.53 1802.16,3006.53 1787.7,3021 1595.33,3021 1553.33,3063 1218,3063 J6.4 1133,3062 1055,3062 1031,3038 1031,2872 1080,2823 1176.5,2823 1233.5,2880 1233.5,2940 1255,2961.5 1464.03,2961.5 1481,2978.47 1568.53,2978.47 1940,2607 1940,2080 1916,2056 1916,1272 1940,1248 2640,1248 2695,1303 2695,1388 2663,1420 2605,1420 U1.17
NetC1_2: C1.2 C2.2 C3.2 L1.2 U2.4 U2.32 | length 720.6
  Top Layer w10: U2.32 U2.32@1770.24,1873 ; C2.2 C3.2 1897.25,2015 1883,2029.25 U2.4 1790.55,2029.25 1770.24,2008.93 U2.32@1770.24,1873 ; L1.2 1900.29,1826.46 C1.2 1870,1843 1840,1873 U2.32@1770.24,1873
NetC6_2: C6.2 U2.27 | length 213.4
  Top Layer w10: C6.2 1612.76,1679.22 U2.27
NetC10_1: C10.1 J4.1 | length 108.3
  Top Layer w10: C10.1 3725,2895 3745,2915 J4.1
NetC22_1: C22.1 C23.1 L2.2 U1.7 | length 403
  Top Layer w10: L2.2 2955,1967 2976,1946 2976,1882.08 C22.1 2955,1843.46 2956.46,1842 C23.1 2940,1805 2940,1799.96 U1.7
NetC24_1: C24.1 C25.1 L3.2 U1.20 | length 703.8
  Top Layer w10: C25.1 2745,1261 2799,1261 2855,1317 U1.20 ; v1(3065,1435) 3095,1405 3095,1335 3053,1293 3053,1265 L3.2 3048.54,1226.46 C24.1
  Bottom Layer w10: U1.20 2920,1435 v1(3065,1435)
NetD4_2: D4.2 R9.1 R10.2 | length 155.7
  Top Layer w10: D4.2 1073.84,2010 R10.2 1132.96,2036 1140,2043.04 R9.1
NetD5_2: D5.2 R11.2 R12.1 SW1.3 SW1.4 | length 573.3
  Top Layer w10: SW1.3 SW1.4 3682.96,2185.51 R12.1 3682.96,2074.12 D5.2 3658.84,2023.84 3635,2000 R11.2
NetH2_1: H2.1 U1.23 | length 300.4
  Top Layer w10: U1.23 3180,1345 H2.1
NetH2_2: H2.2 U1.24 | length 300.4
  Top Layer w10: U1.24 3255,1105 H2.2
NetH2_3: H2.3 U1.25 | length 300.4
  Top Layer w10: U1.25 3355,1105 H2.3
NetH2_4: H2.4 U1.26 | length 300.4
  Top Layer w10: U1.26 3455,1105 H2.4
NetH2_5: H2.5 H4.9 U1.27 | length 2925.2
  Top Layer w10: H4.9 2636,3111 3384,3111 3415,3080 3415,1510 U1.27 3555,1105 H2.5
NetH2_6: H2.6 H4.10 U1.28 | length 3362.1
  Top Layer w10: H4.10 2646,3021 2560,3021 2546,3035 2546,3100 2573,3127 3494,3127 3513,3108 3513,2887 3457.61,2831.61 3457.61,2046.39 3600,1904 3600,1425 U1.28 3655,1105 H2.6
NetH3_3: H3.3 U1.4 | length 1377.1
  Top Layer w10: U1.4 3355,2373 3360,2378 H3.3
NetH3_4: H3.4 U1.5 | length 1377.1
  Top Layer w10: U1.5 3255,2373 3260,2378 H3.4
NetH3_5: H3.5 U1.6 | length 1377.1
  Top Layer w10: U1.6 3155,2373 3160,2378 H3.5
NetH3_6: H3.6 U1.11 | length 1542.8
  Bottom Layer w10: U1.11 3060,2089.96 H3.6
NetH3_7: H3.7 U1.12 | length 1572.2
  Top Layer w10: U1.12 2555,1712.96 2534.23,1712.96 2534.23,2634.23 H3.7
NetH3_8: H3.8 U1.13 | length 1542.8
  Bottom Layer w10: U1.13 2455,2655 H3.8
NetH4_2: H4.2 U1.15 | length 2176.3
  Bottom Layer w10: H4.2 1934,3109 2220,3109 2246,3083 2246,2047 2395,1898 2395,1410 U1.15
NetH4_3: H4.3 U1.16 | length 2598
  Bottom Layer w10: H4.3 1946.53,3021.53 1860,3021.53 1846,3035.53 1846,3103 1869,3126 2408,3126 2434,3100 2434,2950 2415,2931 2415,1410 U1.16
NetJ4_3: J4.3 R8.1 | length 102.1
  Top Layer w10: R8.1 3732,2720 3737,2715 J4.3
NetLED1_1: LED1.1 R4.1 | length 636.3
  Top Layer w10: LED1.1 2211.35,2650.35 2269,2708 2360,2708 2404,2664 2404,2487 2360,2443 2300,2443 2287.96,2455.04 R4.1
NetLED2_1: LED2.1 R5.1 | length 156.8
  Top Layer w10: LED2.1 2211.35,2480.7 2288,2557.35 R5.1
NetLED3_1: LED3.1 R18.1 | length 114.1
  Top Layer w10: R18.1 3560,2575 3570,2585 LED3.1
NetLED4_1: LED4.1 R19.1 | length 78.7
  Top Layer w10: LED4.1 2247,2735 2252,2730 R19.1
NetLED4_2: LED4.2 U8.4 | length 456.2
  Top Layer w10: U8.4 2083.05,2817.6 2128.65,2772 LED4.2
NetR1_1: R1.1 USB1.4 | length 112.4
  Top Layer w10: USB1.4 1244,1659.4 1261,1642.4 1261,1614.66 R1.1
NetR7_1: R7.1 U2.15 | length 131
  Top Layer w10: R7.1 1580,2283.26 1581.26,2282 U2.15
NetR15_1: R15.1 R16.2 SW2.3 SW2.4 | length 564.5
  Top Layer w10: R16.2 1940,1548 1919,1548 1919,1420.92 R15.1 1940,1320.63 SW2.4
  Bottom Layer w10: SW2.4 SW2.3
NetR17_2: R17.2 U7.4 | length 87.8
  Top Layer w10: U7.4 2146,1497.6 2153.6,1490 R17.2
NetR24_2: R24.2 U1.19 | length 269.9
  Top Layer w10: R24.2 2537.04,1288.04 2560,1311 2696,1311 U1.19
RXD: H3.1 U1.3 U2.8 | length 5305.7
  Top Layer w10: U2.8 1864.76,2155.24 v1(1900,2120)
  Bottom Layer w10: v1(1900,2120) 1900,1247 1920,1227 3145,1227 3198,1280 3198,1427.96 3411.04,1641 ; U1.3 3411.04,1641 ; H3.1 3722,3060 3826,2956 3826,2790 3810,2774 3777,2774 2905,1902 2905,1676 2940,1641 3411.04,1641
SCK: H4.6 J6.3 R24.1 U8.1 U8.2 | length 3439.7
  Top Layer w10: J6.3 1218,2963 1218,3025 1255,3062 1533.33,3062 1620,2975.33 1620,2892.4 U8.1 U8.2 1758,2855 1778,2835 2060,2835 H4.6 2367,2988 2367,2958 2440,2885 2510,2885 2555,2840 2555,2778 2500,2723 2500,1630 2502.96,1627.04 R24.1
TXD: H3.2 U1.2 U2.9 | length 4667.4
  Top Layer w10: U2.9 1770.24,2250 1785.24,2265 v1(1900,2265) ; H3.2 3460,2860 3442.61,2842.61 3442.61,1797.35 U1.2
  Bottom Layer w10: v1(1900,2265) 1855,2220 1855,1230 1876,1209 3268,1209 3415,1356 3415,1544.96 U1.2
USB_DN-: D2.2 U2.30 USB1.2 | length 673.7
  Top Layer w10: USB1.2 1245.6,1710.6 1275,1740 D2.2 1275,1791 1310,1791 1325,1806 1325,1840 1400,1915 1704,1915 U2.30
USB_DP+: D3.2 U2.29 USB1.3 | length 609.9
  Top Layer w10: USB1.3 1284,1685 1310,1711 D3.2 1310,1747 v1(1368,1805) ; U2.29 1675.75,1807.25 v1(1678,1805)
  Bottom Layer w10: v1(1368,1805) v1(1678,1805)
USER_BUF_BUTTON: C14.2 R14.1 R16.1 U7.1 U7.2 | length 370.3
  Top Layer w10: R16.1 1969,1512.96 1991.04,1535 U7.2 U7.1 1997,1572.4 R14.1@1997,1700 ; C14.2 1940,1680 1960,1700 R14.1@1997,1700 ; R14.1 R14.1@1997,1700
pads on no net: U2.5 U2.6 U2.7 U2.12 U2.14 U2.22 U2.23 U2.25 U2.26
copper on no net: | length 10001.4
  Top Layer w10: 1000,1000 1000,3155 ccw(c1005,3155) 1005,3150 3850,3150 3850,1015 cw(c3835,1015) 3835,1000 1000,1000